# Altium PCB ElectronicLoad.PcbDoc
Units mil, origin at the board's own origin, x right, y up, seen from the top; angles counter-clockwise.
Board outline 6000 x 2000 mil, 2 copper layers (Top Layer, Bottom Layer); 16 components, 6 nets, 46 pads, 0 vias.
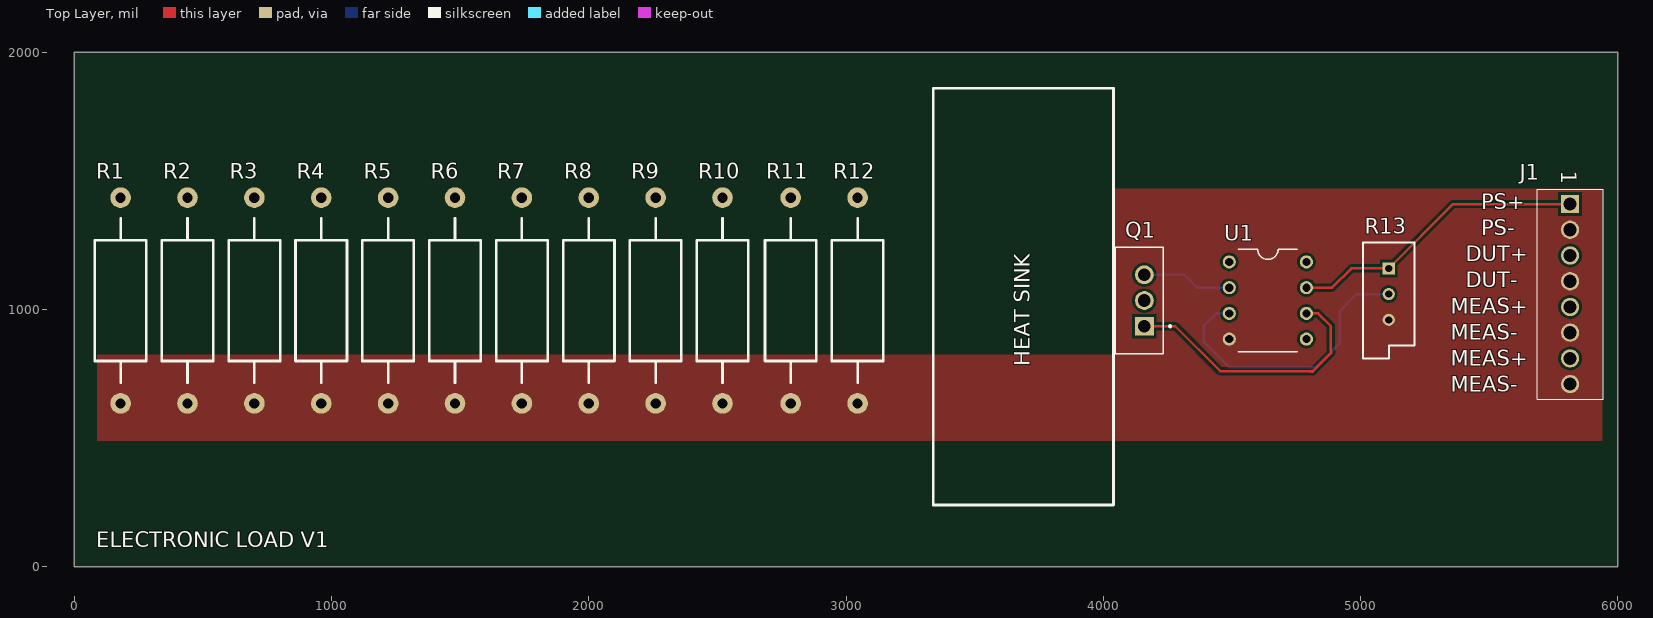
[diagram p0: Top Layer view]
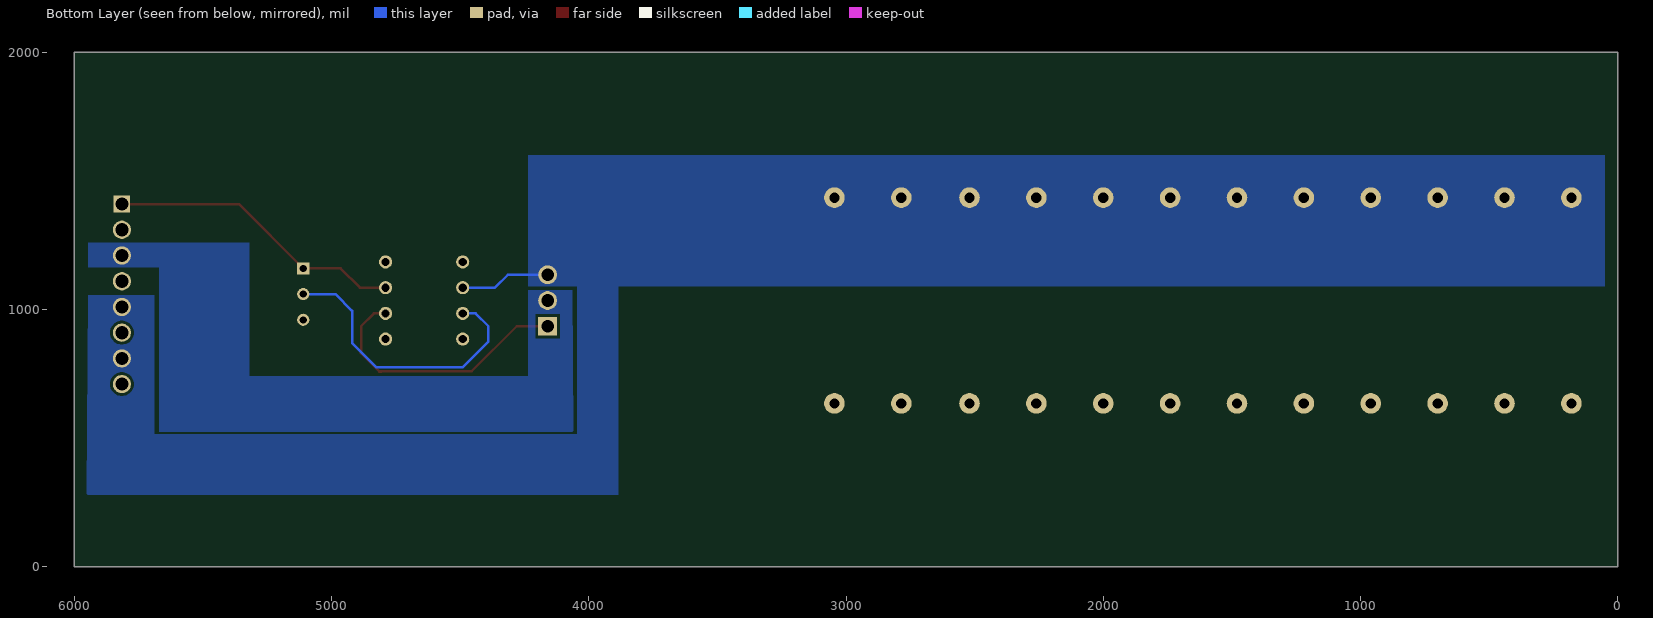
[diagram p1: Bottom Layer view, seen from below]

## Layer stack, top to bottom
Top Solder: solder mask 0.4, Solder Resist, Dk 3.5
Top Layer: signal copper 1.4
Dielectric 1: dielectric 12.6, FR-4, Dk 4.8
Bottom Layer: signal copper 1.4
Bottom Solder: solder mask 0.4, Solder Resist, Dk 3.5

## Board outline
0,0 0,2000 6000,2000 6000,0

## Design rules (kind name [scope] priority, off if disabled: settings)
Clearance [All] p1: gap=10 ignorepadtopadclearanceinfootprint=FALSE except(0: Arc-Hole Track-Hole SMDPad-Hole THPad-Hole Via-Hole Fill-Hole Poly-Hole Region-Hole Text-Hole)
PolygonConnect PolygonConnect_1 [(InNet('BATT+') OR InNet('MEAS+') OR InNet('GND'))] p1: thpad.connectstyle=Direct thpad.reliefconductorwidth=10 thpad.reliefentries=4 thpad.polygonreliefangle="90 Angle" thpad.airgapwidth=10 smdpad.connectstyle=Relief smdpad.reliefconductorwidth=10 smdpad.reliefentries=4 smdpad.polygonreliefangle="90 Angle" smdpad.airgapwidth=10 via.connectstyle=Relief via.reliefconductorwidth=10 via.reliefentries=4 via.polygonreliefangle="90 Angle" via.airgapwidth=10
PolygonConnect [All] p2: connectstyle=Relief reliefconductorwidth=10 reliefentries=4 polygonreliefangle="90 Angle" airgapwidth=10
RoutingVias [All] p1: holewidth=28 width=50 viastyle="Through Hole" minholewidth=28 minwidth=50 maxholewidth=28 maxwidth=50
SolderMaskExpansion [All] p1: expansion=4 istentingtop=FALSE
Width [All] p1: maxlimit=10 minlimit=10 preferedwidth=10
30 further rules are at their usual default settings.

## Components (designator, comment, footprint, x,y, rotation, side; value= is the part's Value field where it differs from the comment)
J1 "CONN8" CONN8_8X100 5815,1410 r270 top
Q1 "MTP3055VL" TO-220-3 4160,1035 r90 top
R1 "Res3" R_ThruHole_3W 180,635 r90 top value=10
R2 "Res3" R_ThruHole_3W 440,635 r90 top value=10
R3 "Res3" R_ThruHole_3W 700,635 r90 top value=10
R4 "Res3" R_ThruHole_3W 960,635 r90 top value=10
R5 "Res3" R_ThruHole_3W 1220,635 r90 top value=10
R6 "Res3" R_ThruHole_3W 1480,635 r90 top value=10
R7 "Res3" R_ThruHole_3W 1740,635 r90 top value=10
R8 "Res3" R_ThruHole_3W 2000,635 r90 top value=10
R9 "Res3" R_ThruHole_3W 2260,635 r90 top value=10
R10 "Res3" R_ThruHole_3W 2520,635 r90 top value=10
R11 "Res3" R_ThruHole_3W 2785,635 r90 top value=10
R12 "Res3" R_ThruHole_3W 3045,635 r90 top value=10
R13 "Potentiometer" VR5 5110,1060 r270 top
U1 "MCP6241" DIP8 4640,1035 r270 top

## Footprints (in the part's own frame and the unit in brackets; to place one, negate y for a bottom-side part, rotate by r counter-clockwise, add the part's x,y. Pads: shape width x height; smd on the part's side, far side on the other; paste and mask are expansions set on the pad)
CONN8_8X100 [mm]
  rect 1.8x1.8 / inner round 1.651 / far side rect 1.651x1.651 hole 1.3: 1(0,0)
  round 1.8 hole 1.3: 2(2.54,0) 3(5.08,0) 4(7.62,0) 5(10.16,0) 6(12.7,0) 7(15.24,0) 8(17.78,0)
  silkscreen extent -1.47,-3.25 19.25,3.25
DIP8 [mm]
  round 1.3 hole 0.813: 1(-3.81,-3.81) 2(-1.27,-3.81) 3(1.27,-3.81) 4(3.81,-3.81) 5(3.81,3.81) 6(1.27,3.81) 7(-1.27,3.81) 8(-3.81,3.81)
  silkscreen extent -5.08,-2.92 5.08,2.92
R_ThruHole_3W [mil]
  round 80 hole 40: 1(0,0) 2(800,0)
  silkscreen extent 80,-100 720,100
TO-220-3 [mm]
  rect 1.86x1.86 hole 1.24: 1(-2.54,0)
  round 1.86 hole 1.24: 2(0,0) 3(2.54,0)
  silkscreen extent -5.27,-2.64 5.27,2.86
VR5 [mm] "Thru-Hole; 3 Leads"
  rect 1.2x1.2 hole 0.7: 1(-2.54,0)
  round 1.2 hole 0.7: 2(0,0) 3(2.54,0)
  silkscreen extent -5.08,-2.54 6.35,2.54

## Part data
J1: "Conn Terminal Block 8 POS 2.54mm Solder ST Thru-Hole 6A", Color=Green, Current=6A, Manufacturer="On-Shore Technology", Manufacturer Part Number=OSTVN08A150, Max Operating Temperature=105°C, Min Operating Temperature=-30°C, Supplier Part Number 1=ED10566-ND, voltage=125V, Category="Terminal Blocks", ComponentLink1Description=https://datasheet.ciiva.com/826/ostvnxxa150-826065.pdf?src-supplier=Digi-Key, ComponentLink1URL=https://datasheet.ciiva.com/826/ostvnxxa150-826065.pdf?src-supplier=Digi-Key, Contact Plating=Brass, Housing Material=Thermoplastic, Mount="Through Hole", Number of Levels=1, Number of Pins=8, Number of Positions Per Level=8, Packaging=Bulk, Pitch=0.1inch, Plating=Brass,Steel, Pricing 1="1=2.48000, 10=1.87500, 25=1.73800, 50=1.56280, 100=1.52460, 250=1.33404, 500=1.21968, 1000=1.10534, 5000=1.01640 (USD)", RoHS=Yes, RoHS Compliant=Yes, Series=OSTVN, Stock 1=13852, Supplier 1=Digi-Key, Termination=Screw, Wire Gauge (Max)=30AWG, Wire Gauge (Min)=20AWG
Q1: "Transistor MOSFET N Channel 60 Volt 12 Amp 3 Pin TO-220-3", Case/Package=TO-220AB, Continuous Drain Current (ID)=12A, Drain to Source Breakdown Voltage=60V, Drain to Source Resistance=180mR, Gate to Source Voltage (Vgs)=15V, Input Capacitance=570pF, Manufacturer="ON Semiconductor / Fairchild", Max Operating Temperature=175°C, Max Power Dissipation=48W, Min Operating Temperature=-55°C, Package Quantity=50, Supplier Part Number 1=MTP3055VLFS-ND, Threshold Voltage=1.6V, Category=MOSFETs, CLASS=IC, ComponentLink1Description=https://datasheet.ciiva.com/22681/661064-22681921.pdf?src-supplier=Element14, ComponentLink1URL=https://datasheet.ciiva.com/22681/661064-22681921.pdf?src-supplier=Element14, ComponentLink2Description=https://datasheet.ciiva.com/4444/mtp3055vl-116369-4444450.pdf?src-supplier=Mouser, ComponentLink2URL=https://datasheet.ciiva.com/4444/mtp3055vl-116369-4444450.pdf?src-supplier=Mouser, ComponentLink3Description=https://datasheet.ciiva.com/25625/0900766b810e259a-25625324.pdf?src-supplier=RSComponents, ComponentLink3URL=https://datasheet.ciiva.com/25625/0900766b810e259a-25625324.pdf?src-supplier=RSComponents, ComponentLink4Description=https://datasheet.ciiva.com/19459/873602-19459514.pdf?src-supplier=Jameco, ComponentLink4URL=https://datasheet.ciiva.com/19459/873602-19459514.pdf?src-supplier=Jameco, ComponentLink5Description=https://datasheet.ciiva.com/956/mtp3055vl-d-956226.pdf?src-supplier=Digi-Key, ComponentLink5URL=https://datasheet.ciiva.com/956/mtp3055vl-d-956226.pdf?src-supplier=Digi-Key, ComponentLink6Description=https://datasheet.ciiva.com/26791/mtp3055vl-26791705.pdf?src-supplier=IIIC, ComponentLink6URL=https://datasheet.ciiva.com/26791/mtp3055vl-26791705.pdf?src-supplier=IIIC, ComponentLink7Description=https://datasheet.ciiva.com/8114/mtp3055vl-8114732.pdf?src-supplier=Avnet, ComponentLink7URL=https://datasheet.ciiva.com/8114/mtp3055vl-8114732.pdf?src-supplier=Avnet, ComponentLink8Description=https://datasheet.ciiva.com/16956/mtp3055vl-16956647.pdf?src-supplier=Future+Electronics, ComponentLink8URL=https://datasheet.ciiva.com/16956/mtp3055vl-16956647.pdf?src-supplier=Future+Electronics, ComponentLink9Description=https://datasheet.ciiva.com/26143/mtp3055vl-26143884.pdf?src-supplier=Avnet+Europe, ComponentLink9URL=https://datasheet.ciiva.com/26143/mtp3055vl-26143884.pdf?src-supplier=Avnet+Europe, ComponentLink10Description=https://datasheet.ciiva.com/48715/001264952-da-01-en-mosfet-n-ch-60v-1-mtp3055vl-to-220-3-fsc-48715526.pdf?src-supplier=Conrad, ComponentLink10URL=https://datasheet.ciiva.com/48715/001264952-da-01-en-mosfet-n-ch-60v-1-mtp3055vl-to-220-3-fsc-48715526.pdf?src-supplier=Conrad, Current Rating=12A, Drain to Source Voltage (Vdss)=60V, Element Configuration=Single, Fall Time=90ns, Height=16.51mm, Lead Free="Lead Free", Length=10.67mm, Manufacturer Part Number=MTP3055VL, Mount="Through Hole", Nominal Vgs=15V, Number of Elements=1, Number of Pins=3, On-State Resistance=180mR, Packaging=Rail/Tube, Power Dissipation=48W, Pricing 1="1=1.55000, 10=1.38200, 100=1.07730, 500=0.88992, 1000=0.74515 (USD)", Rds On Max=180mR, REACH SVHC="No SVHC", Rise Time=190ns, RoHS=Yes, RoHS Compliant=Yes, Stock 1=558, Supplier 1=Digi-Key, Turn-Off Delay Time=30ns, Turn-On Delay Time=20ns, Voltage Rating (DC)=60V, Weight=1.8g, Width=4.83mm
R1 R2 R3 R4 R5 R6 R7 R8 R9 R10 R11 R12: "Res Wirewound 10 Ohm 1% 3W ±20ppm/°C Ceramic Hi Temp Sil AXL Thru-Hole T/R", Case/Package=Ceramic, Manufacturer="Vishay Dale", Manufacturer Part Number=RS02B10R00FE70, Max Operating Temperature=250°C, Max Power Dissipation=3W, Min Operating Temperature=-65°C, Package Quantity=1, Resistance=10R, Resistance Tolerance=1%, Resistor Type=Wirewound, Supplier Part Number 1=RSB-10RCT-ND, Temperature Coefficient=20ppm/°C, Voltage Rating (DC)=5.48V, Category="Through-Hole Resistors", ComponentLink1Description=https://datasheet.ciiva.com/3260/rsns-3260765.pdf?src-supplier=Avnet, ComponentLink1URL=https://datasheet.ciiva.com/3260/rsns-3260765.pdf?src-supplier=Avnet, ComponentLink2Description=https://datasheet.ciiva.com/8790/rsns-8790701.pdf?src-supplier=Avnet, ComponentLink2URL=https://datasheet.ciiva.com/8790/rsns-8790701.pdf?src-supplier=Avnet, ComponentLink3Description=https://datasheet.ciiva.com/2716/rsns-2716118.pdf?src-supplier=Digi-Key, ComponentLink3URL=https://datasheet.ciiva.com/2716/rsns-2716118.pdf?src-supplier=Digi-Key, ComponentLink4Description=https://datasheet.ciiva.com/2716/rsns-2716119.pdf?src-supplier=Digi-Key, ComponentLink4URL=https://datasheet.ciiva.com/2716/rsns-2716119.pdf?src-supplier=Digi-Key, ComponentLink5Description=https://datasheet.ciiva.com/16377/rsns-16377193.pdf?src-supplier=Future+Electronics, ComponentLink5URL=https://datasheet.ciiva.com/16377/rsns-16377193.pdf?src-supplier=Future+Electronics, ComponentLink6Description=https://datasheet.ciiva.com/7734/rsns-7734117.pdf?src-supplier=Element14, ComponentLink6URL=https://datasheet.ciiva.com/7734/rsns-7734117.pdf?src-supplier=Element14, Construction=Cylindrical, Contact Plating=Tin,Matte, Diameter=4.75mm, Features="Moisture Resistant", LatestRevisionDate=29-May-2009, LatestRevisionNote="IPC-7351 Footprint Added.", Lead Diameter=0.81mm, Lead Free="Lead Free", Lead Length=38.1mm, Length=15.8mm, Military Standard=Not, Number of Pins=2, Number of Terminations=2, PackageDescription="Chip Resistor", PackageReference=J1-0603, Packaging="Tape and Reel", Power Rating=3W, Pricing 1="1=1.34000, 10=1.18400, 25=1.08880, 50=0.99320, 100=0.85950, 250=0.72580, 500=0.61120 (USD)", Published=8-Jun-2000, Publisher="Altium Limited", Radiation Hardening=No, REACH SVHC=Unknown, RoHS=Yes, RoHS Compliant=Yes, Series=RS, Stock 1=3839, Supplier 1=Digi-Key, Termination=Axial, Tolerance=1%, Width=4.75mm
R13: "Res Cermet Trimmer 500K Ohm 10% 1/2W 15(Elec)/18(Mech)Turn 2.3mm (9.6 X 4.8 X 10.7mm) Pin Thru-Hole Bulk", Color=Blue, Manufacturer="Nidec Copal", Manufacturer Part Number=CT-94EW504, Max Operating Temperature=125°C, Max Power Dissipation=500mW, Min Operating Temperature=-55°C, Package=None, Package Quantity=50, Resistance=500kR, Resistor Type=Cermet, Supplier Part Number 1=CT94EW504-ND, Temperature Coefficient=100ppm/°C, Tolerance=10%, Availability=Unavailable, Category="Variable Resistors and Potentiometers", ComponentLink1Description=https://datasheet.ciiva.com/2161/ct-94-2161937.pdf?src-supplier=Digi-Key, ComponentLink1URL=https://datasheet.ciiva.com/2161/ct-94-2161937.pdf?src-supplier=Digi-Key, Contact Plating=Tin, Height=0.378inch, Lead Free="Lead Free", Length=0.378inch, MF="TE Connectivity", Mount="Through Hole", MP=2-1625931-5, Number of Turns=18, Packaging=Bulk, Price=None, Pricing 1="1=1.55000, 10=1.36400, 25=1.22720, 50=1.18160, 100=1.13620, 250=1.06808, 500=0.90900, 1000=0.84082, 5000=0.69084 (USD)", RoHS=Yes, Series=CT94, SnapEDA_Link=https://www.snapeda.com/parts/2-1625931-5/TE%20Connectivity%20Passive%20Product/view-part/210283/?ref=snap, Stock 1=1213, Supplier 1=Digi-Key, TE_purchase_URL=https://www.te.com/usa-en/product-2-1625931-5.html?te_bu=Cor&te_type=disp&te_campaign=seda_glo_cor-seda-global-disp-prtnr-fy19-seda-model-bom-cta_sma-317_1&elqCampaignId=32493, Termination="PC Pin", Weight=920mg, Width=0.189inch
U1: "IC, Op Amp, Operating Voltage, 1.8 - 5.5V, Outputs, 1, GBWP, 550kHz, PDIP-8", Case/Package=PDIP, Input Bias Current=1pA, Input Offset Voltage (Vos)=5mV, Manufacturer=Microchip, Manufacturer Part Number=MCP6241-E/P, Max Frequency=1kHz, Max Input Voltage=5.5V, Max Operating Temperature=125°C, Min Input Voltage=1.8V, Min Operating Temperature=-40°C, Nominal Supply Current=50uA, Output Current=23mA, Package Quantity=60, Supplier Part Number 1=MCP6241-E/P-ND, Voltage Gain=110dB, Amplifier Type="GENERAL PURPOSE", Bandwidth=650kHz, Category="Amplifiers - Op Amps, Buffer, Instrumentation", Common Mode Rejection Ratio=60dB, ComponentLink1Description=https://datasheet.ciiva.com/1804/21882d-1804785.pdf?src-supplier=Digi-Key, ComponentLink1URL=https://datasheet.ciiva.com/1804/21882d-1804785.pdf?src-supplier=Digi-Key, ComponentLink2Description=https://datasheet.ciiva.com/11710/jp019941-11710197.pdf?src-supplier=Avnet, ComponentLink2URL=https://datasheet.ciiva.com/11710/jp019941-11710197.pdf?src-supplier=Avnet, ComponentLink3Description=https://datasheet.ciiva.com/8078/630314-8078893.pdf?src-supplier=Element14, ComponentLink3URL=https://datasheet.ciiva.com/8078/630314-8078893.pdf?src-supplier=Element14, ComponentLink4Description=https://datasheet.ciiva.com/16756/jp019941-16756015.pdf?src-supplier=Avnet+Europe, ComponentLink4URL=https://datasheet.ciiva.com/16756/jp019941-16756015.pdf?src-supplier=Avnet+Europe, ComponentLink5Description=https://datasheet.ciiva.com/14545/70048229-14545020.pdf?src-supplier=Allied+Electronics, ComponentLink5URL=https://datasheet.ciiva.com/14545/70048229-14545020.pdf?src-supplier=Allied+Electronics, Gain Bandwidth Product=550kHz, Height=0.195inch, Lead Free="Lead Free", Length=10.16mm, Max Supply Voltage=5.5V, Min Supply Voltage=1.8V, Mount="Through Hole", Number of Amplifiers=1, Number of Channels=1, Number of Circuits=1, Number of Elements=1, Number of Pins=8, Packaging=Rail/Tube, Pricing 1="1=0.39000, 25=0.32880, 100=0.30000 (USD)", Radiation Hardening=No, REACH SVHC="No SVHC", RoHS=Yes, RoHS Compliant=Yes, Slew Rate=0.3V/µs, Stock 1=1246, Supplier 1=Digi-Key, Supply Current=50uA, Technology=CMOS, Unity Gain Bandwidth Product=550kHz, Width=0.28inch

## Nets (pads, with @x,y where several pads share a name; then routed paths per layer and width w, separated by ;. In a path a pad name is that pad's centre, name@x,y a point inside that pad or via, vN(x,y) a via of type N, cw(c..) or ccw(c..) an arc to the next point about the centre after c; other vN are vias at no path point)
BATT+: J1.3 Q1.2
GND: J1.2 J1.4 J1.6 J1.8 R1.1 R2.1 R3.1 R4.1 R5.1 R6.1 R7.1 R8.1 R9.1 R10.1 R11.1 R12.1 R13.3 U1.4
MEAS+: J1.5 J1.7 Q1.3 R1.2 R2.2 R3.2 R4.2 R5.2 R6.2 R7.2 R8.2 R9.2 R10.2 R11.2 R12.2 U1.2 | length 350.7
  Bottom Layer w10: Q1.3 4315,1135 4365,1085 U1.2
NetQ1_1: Q1.1 U1.6 | length 1048.6
  Top Layer w10: Q1.1 4280,935 4455,760 4805,760 4805.86,759.14 4814.14,759.14 4885.86,830.86 4885.86,839.14 4885,840 4885,935 4835,985 U1.6
NetR13_2: R13.2 U1.3 | length 1133.4
  Bottom Layer w10: U1.3 4440,985 4390,935 4390,875 4490,775 4825,775 4920,870 4920,995 4985,1060 R13.2
VDD: J1.1 R13.1 U1.7 | length 1159.6
  Top Layer w10: U1.7 4890,1085 4965,1160 R13.1 5360,1410 J1.1
pads on no net: U1.1 U1.5 U1.8

## Polygon pours and split planes (outlines as drawn)
BATT+ on Bottom Layer "BATT+_L02_P008" (solid, pour order 8): 4065,1075 4235,1075 4235,740 5320,740 5320,1260 5945,1260 5945,1165 5670,1165 5670,525 4060,525
MEAS+ on Bottom Layer "MEAS+_L02_P004" (solid, pour order 4): 5945,1055 5690,1055 5690,515 4045,515 4045,1160 3885,1160 3885,280 5951.25,280
MEAS+ on Bottom Layer "MEAS+_L02_P001" (solid, pour order 1): 4235,1090 4235,1600 50,1600 50,1090
GND on Top Layer "GND_L01_P000" (solid, pour order 0): 5940,1470 4040,1470 4040,825 90,825 90,490 5940,490

## Silkscreen, mask and mechanical layers (free items; w line width, h text height)
Top Overlay:
  lines w10: 3340,240 4040,240 4040,1860 3340,1860 3340,240
  text "PS+" at 5470,1390 h60
  text "PS-" at 5470,1288.57 h60
  text "DUT+" at 5410.02,1187.14 h60
  text "DUT-" at 5410.02,1085.71 h60
  text "MEAS+" at 5350.04,984.29 h60
  text "MEAS-" at 5350.04,882.86 h60
  text "MEAS+" at 5350.04,781.43 h60
  text "HEAT SINK" at 3715,780.08 h60 r90
  text "MEAS-" at 5350.04,680 h60
  text "ELECTRONIC LOAD V1" at 85,75 h60
Mechanical 1:
  the board outline again, w10

## Text inside footprints (layer, text, board x,y; h text height)
J1: Top Overlay "1" at 5780,1540 h60 r270